# Altium PCB Buzzer piezo PB1475.PcbDoc
Units mm, origin at the board's own origin, x right, y up, seen from the top; angles counter-clockwise.
Board outline 16 x 24 mm, 2 copper layers (Top Layer, Bottom Layer); 4 components, 5 nets, 9 pads, 0 vias.
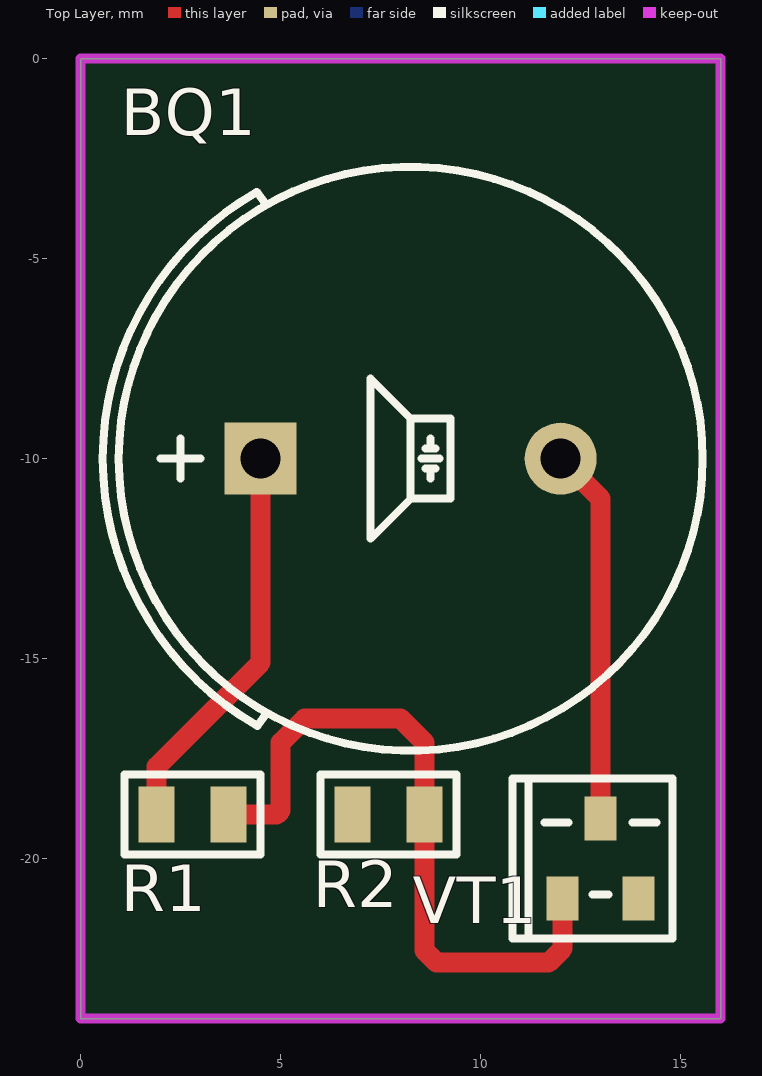
[diagram p0: Top Layer view]
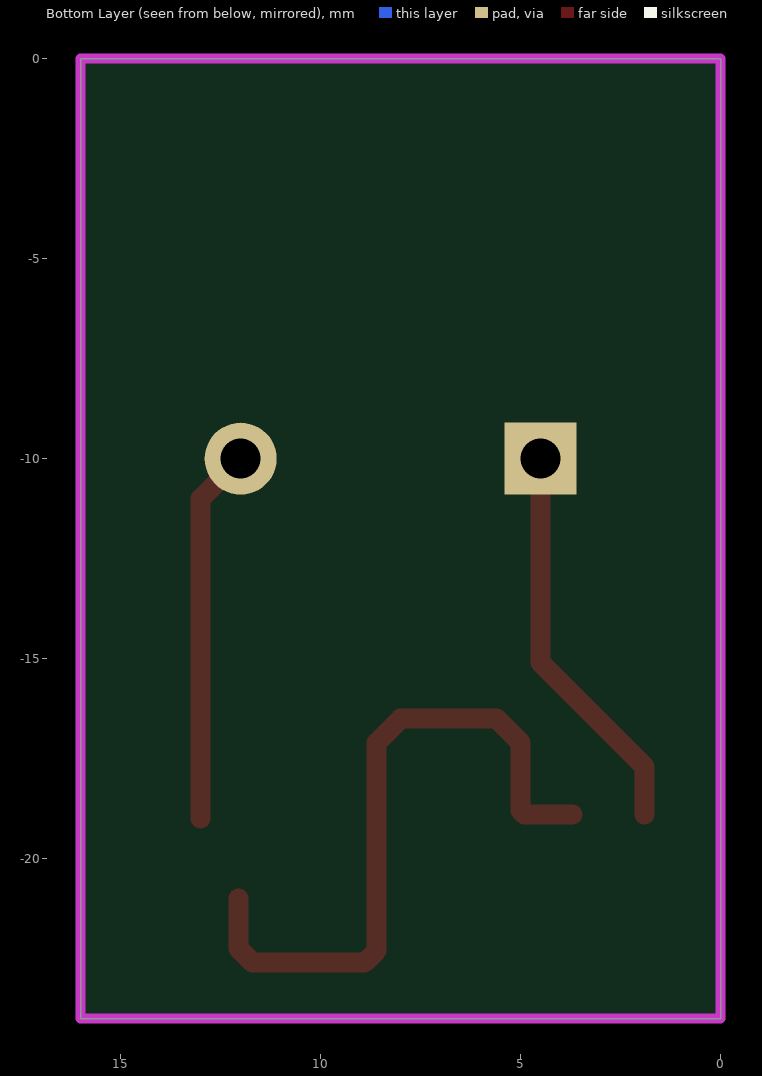
[diagram p1: Bottom Layer view, seen from below]
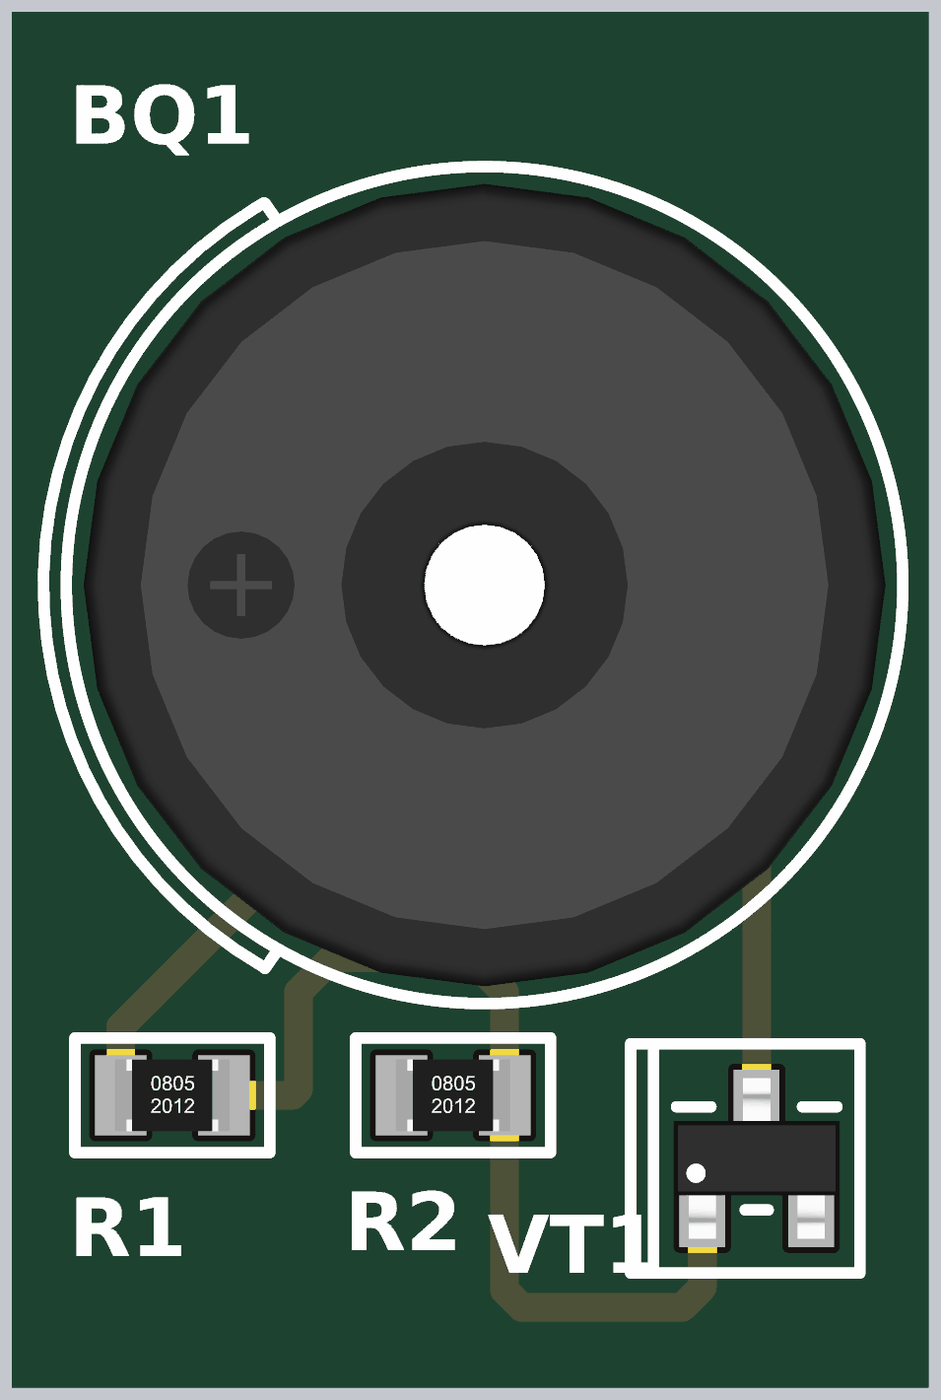
[diagram p2: 3D render of the assembled board from above, using the file's embedded part models]

## Layer stack, top to bottom
Top Solder: solder mask 0.0102, Solder Resist, Dk 3.5
Top Layer: signal copper 0.0356
Dielectric 1: dielectric 0.32, FR-4, Dk 4.8
Bottom Layer: signal copper 0.0356
Bottom Solder: solder mask 0.0102, Solder Resist, Dk 3.5

## Board outline
0,-24 16,-24 16,0 0,0

## Design rules (kind name [scope] priority, off if disabled: settings)
Clearance "Schematic Clearance Constraint" [InNetClass('Signals 100kHz')] p1: gap=0.2 ignorepadtopadclearanceinfootprint=FALSE
Clearance [All] p2: gap=0.254 ignorepadtopadclearanceinfootprint=FALSE except(0: Arc-Hole Track-Hole SMDPad-Hole THPad-Hole Via-Hole Fill-Hole Poly-Hole Region-Hole Text-Hole)
PolygonConnect [All] p1: connectstyle=Relief reliefconductorwidth=0.254 reliefentries=4 polygonreliefangle="90 Angle" airgapwidth=0.254
RoomDefinition "Buzzer piezo PB1475" [InComponentClass('Buzzer piezo PB1475')] p1: confinementstyle=ConfineIn formatcopy=TRUE lockcomponents=FALSE outline 0,-24 16,-24 16,0 0,0
RoutingVias "Schematic Routing Via Style" [InNetClass('Signals 100kHz')] p1: holewidth=0.5 width=1.1 viastyle="Through Hole" minholewidth=0.4 minwidth=0.9 maxholewidth=0.8 maxwidth=1.6
RoutingVias [All] p2: holewidth=0.711 width=1.27 viastyle="Through Hole" minholewidth=0.711 minwidth=1.27 maxholewidth=0.711 maxwidth=1.27
SolderMaskExpansion [All] p1: expansion=0.102
Width "Schematic Width Constraint" [InNetClass('Signals 100kHz')] p1: maxlimit=0.5 minlimit=0.1 preferedwidth=0.25 minimp=50.000000 maximp=50.000000 favimp=50.000000
Width [All] p2: maxlimit=0.254 minlimit=0.254 preferedwidth=0.254
30 further rules are at their usual default settings.

## Classes and differential pairs
net class "Signals 100kHz": GND NetBQ1_2 NetR1_2 NetR2_1 VCC

## Components (designator, comment, footprint, x,y, rotation, side; value= is the part's Value field where it differs from the comment)
BQ1 "PB1475" BUZ-D14x7.5N 8.25,-10 r0 top
R1 "1k" RESC2012N 2.8,-18.9 r0 top
R2 "1k" RESC2012N 7.7,-18.9 r0 top
VT1 "MMBT3904,215" SOT-23-3N 13,-20 r0 top

## Footprints (in the part's own frame and the unit in brackets; to place one, negate y for a bottom-side part, rotate by r counter-clockwise, add the part's x,y. Pads: shape width x height; smd on the part's side, far side on the other; paste and mask are expansions set on the pad)
BUZ-D14x7.5N [mm] "Buzzer, Body d14x7.5mm"
  rect 1.8x1.8 hole 1: 1(-3.75,0)
  round 1.8 hole 1: 2(3.75,0)
  silkscreen extent -7.7,-7.3 7.3,7.3, body extent -7,-7 7,7, height 7.35
RESC2012N [mm] "Chip Resistor, Body 2.0x1.2mm, IPC High Density"
  rect 0.9x1.4 smd: 1(-0.9,0) 2(0.9,0)
  silkscreen extent -1.7,-1 1.7,1, body extent -1,-0.62 1,0.63, height 0.45
SOT-23-3N [mm]
  rect 0.8x1.1 smd: 1(-0.95,-1) 2(0.95,-1) 3(0,1)
  silkscreen extent -2.2,-2 1.8,2, body extent -1.45,-1.4 1.45,1.4, height 1.3

## Part data
BQ1: "Buzzer d14x7.5 TH", Current supply=2mA, Frequency=4kHz, Manufacturer=SWT, Operating temperature="-20°C +70°C", Package=D14x7.5, Voltage supply="1V - 30V", Component="Audio Buzzer", Dimension="14.00mm x 14.00mm", Group=Signal, Height=7.70mm, Mode="Single tone", Mounting type="Through hole", Part name=PB1475, Technology=Piezo
R1 R2: library part RC0805JR-071KL, "RESC 1k 0805(2012)", Manufacturer=Yageo, Operating temperature="-55°C +155°C", Package="0805 (2012)", Power=0.125W, Temperature coefficient=±100ppm/°C, Tolerance=±5%, Component="Resistor Ceramic", Dimension="2.00mm x 1.25mm", Group=Discrete, Height=0.60mm, Mounting type="Surface mount", Part name=RC0805JR-071KL, Type="Thin film"
VT1: "BJT NPN 0.2A 40V", Collector-emiter voltage=40V, Collector current=200mA, Emiter-base voltage=6V, Manufacturer="NXP Semiconductors", Operating temperature="-65°C +150°C", Package=SOT-23-3, Power=250mW, BJT type=NPN, Component="Transistor BJT", Dimension="3.00mm x 2.50mm", Group=Discrete, Height=1.10mm, Mounting type="Surface mount", Part name=MMBT3904,215

## Nets (pads, with @x,y where several pads share a name; then routed paths per layer and width w, separated by ;. In a path a pad name is that pad's centre, name@x,y a point inside that pad or via, vN(x,y) a via of type N, cw(c..) or ccw(c..) an arc to the next point about the centre after c; other vN are vias at no path point)
GND: VT1.2
NetBQ1_2: BQ1.2 VT1.3 | length 9.4
  Top Layer w0.5: BQ1.2 13,-11 VT1.3
NetR1_2: R1.2 R2.2 VT1.1 | length 17.3
  Top Layer w0.5: R1.2 4.9,-18.9 5,-18.8 5,-17.1 5.6,-16.5 8,-16.5 8.6,-17.1 R2.2 8.6,-22.3 8.9,-22.6 11.7,-22.6 12.05,-22.25 VT1.1
NetR2_1: R2.1
VCC: BQ1.1 R1.1 | length 10
  Top Layer w0.5: R1.1 1.9,-17.7 4.5,-15.1 BQ1.1

## Keep-outs
Keep-Out Layer:
  the board outline again, w0.25